# Altium PCB HU_revB.PcbDoc (part 1 of 3)
Units mm, origin at the board's own origin, x right, y up, seen from the top; angles counter-clockwise.
Board outline 180 x 140 mm, 4 copper layers (Top Layer, Mid Layer 1, Mid Layer 2, Bottom Layer), stack 1.586 mm thick; 314 components, 348 nets, 1361 pads, 16 vias.
Unrouted connection lines stored in the file: 902.
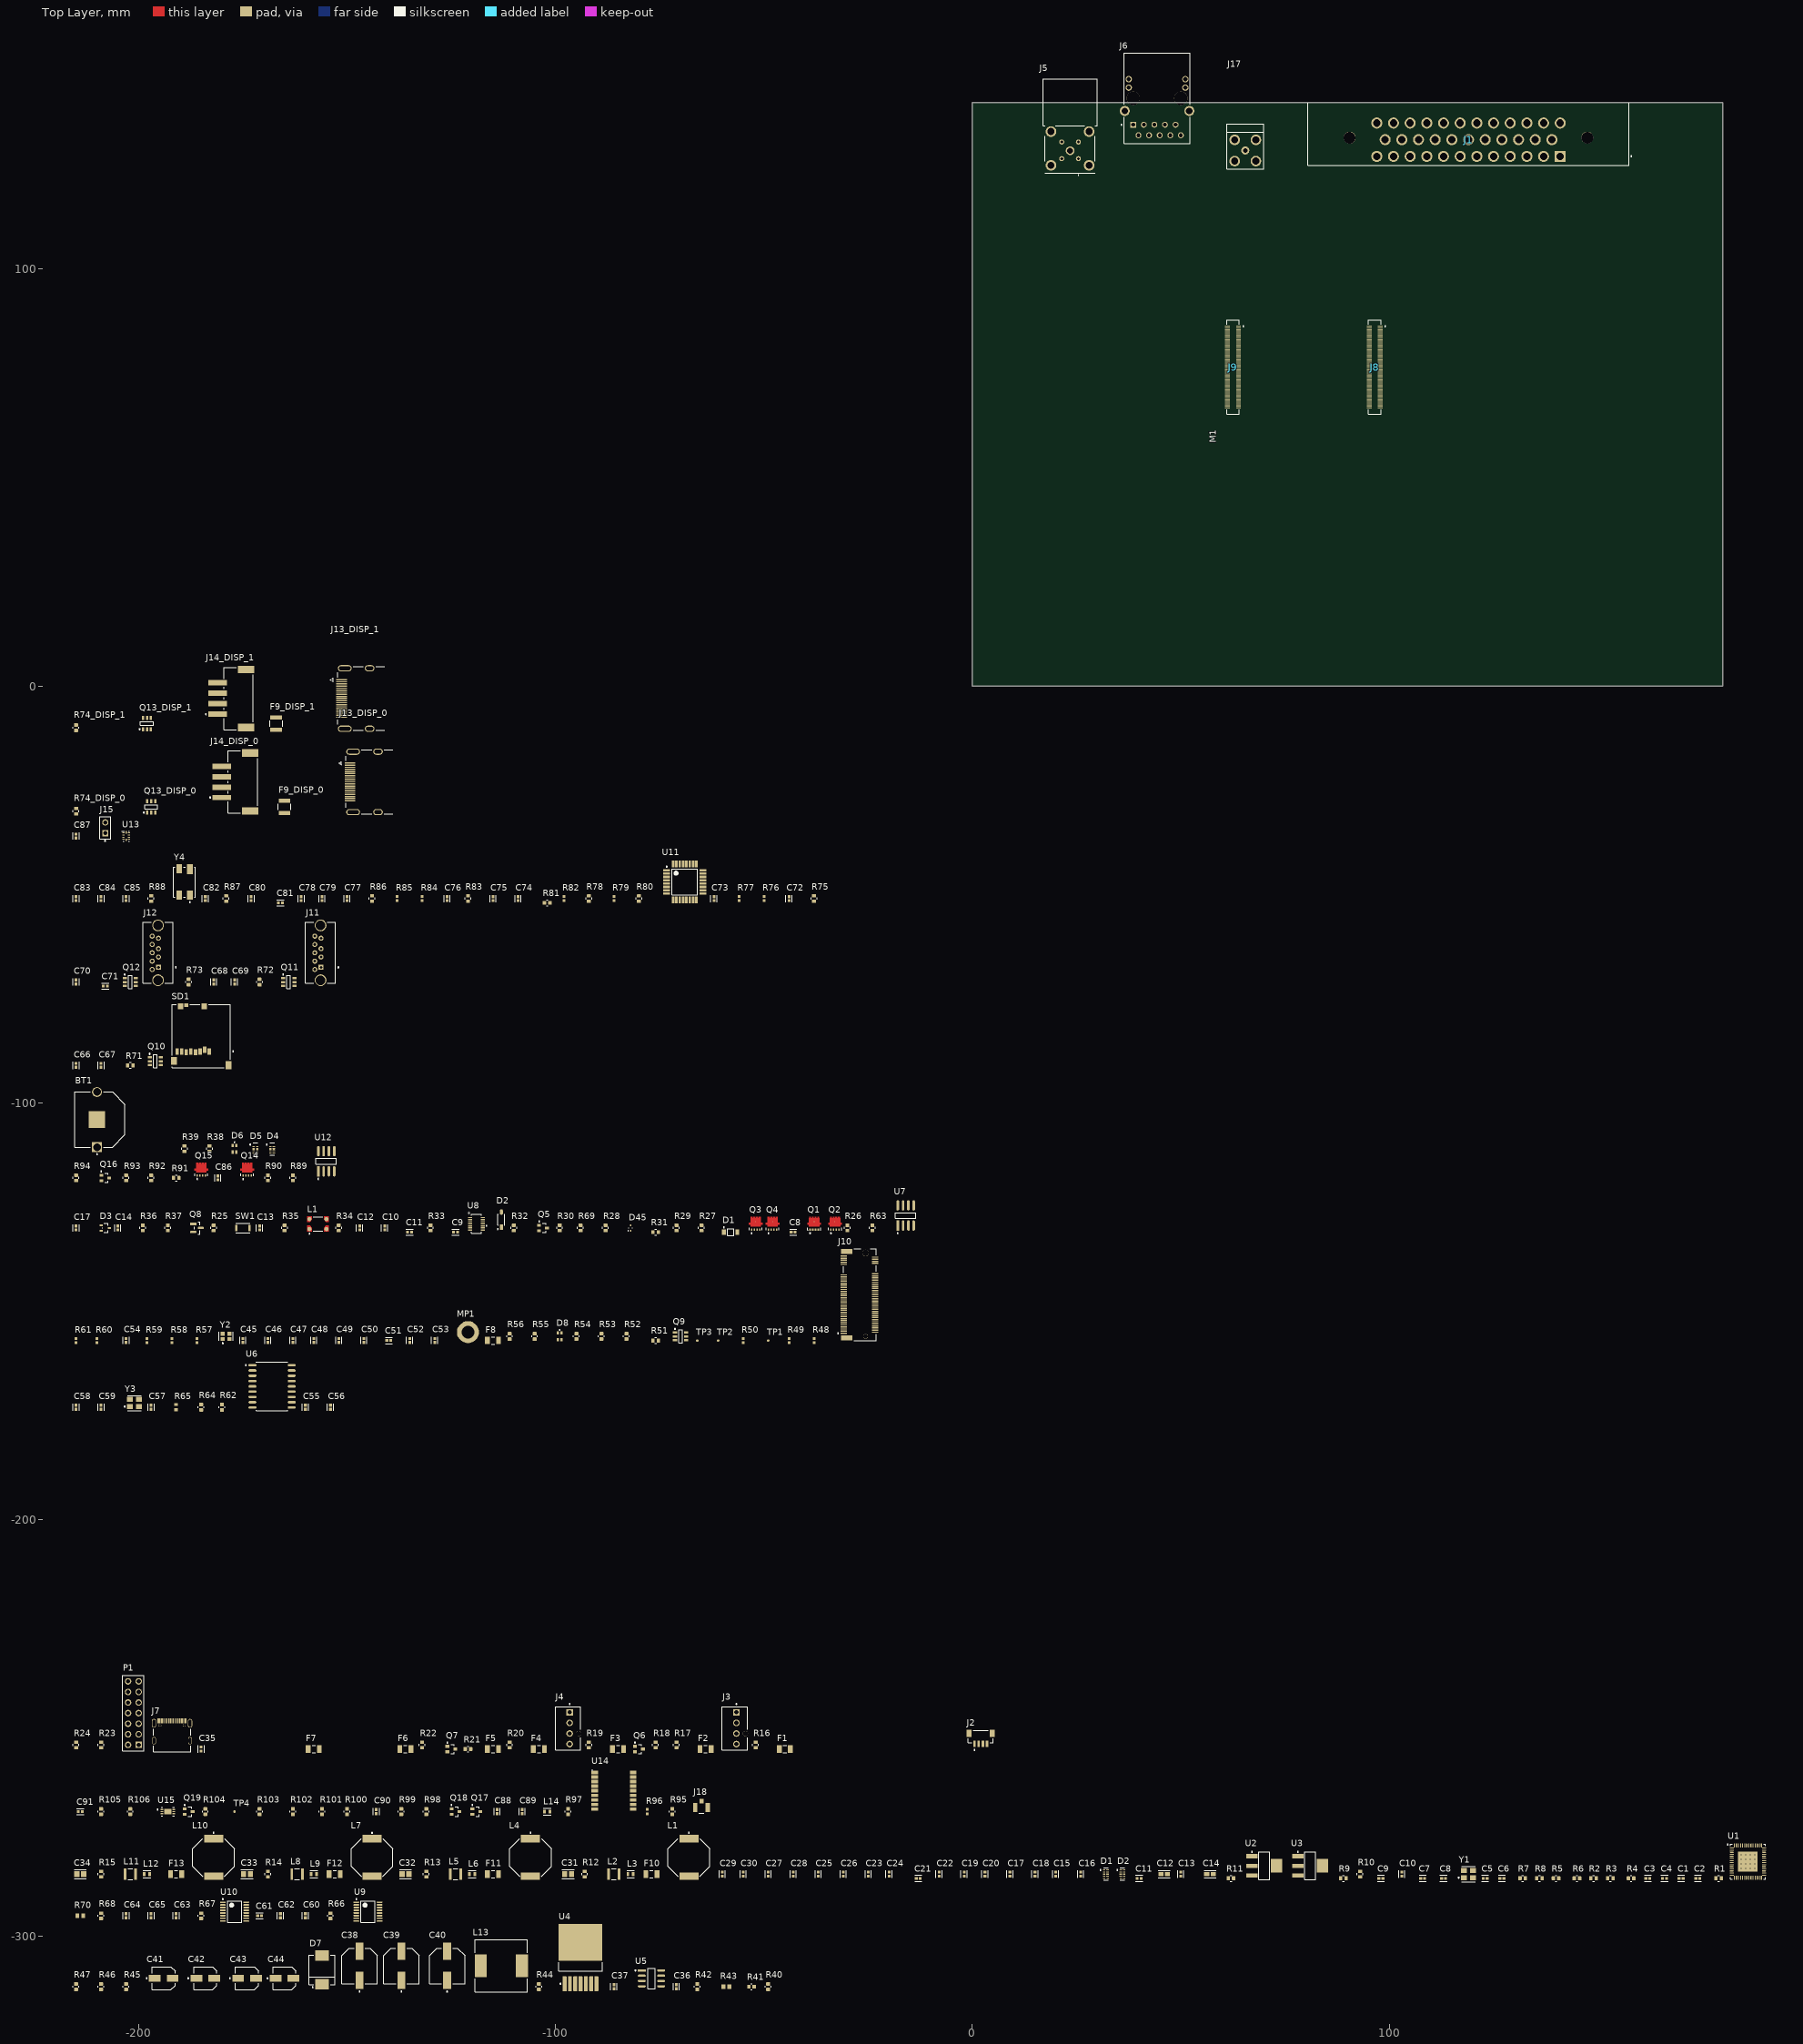
[diagram p0: Top Layer view]
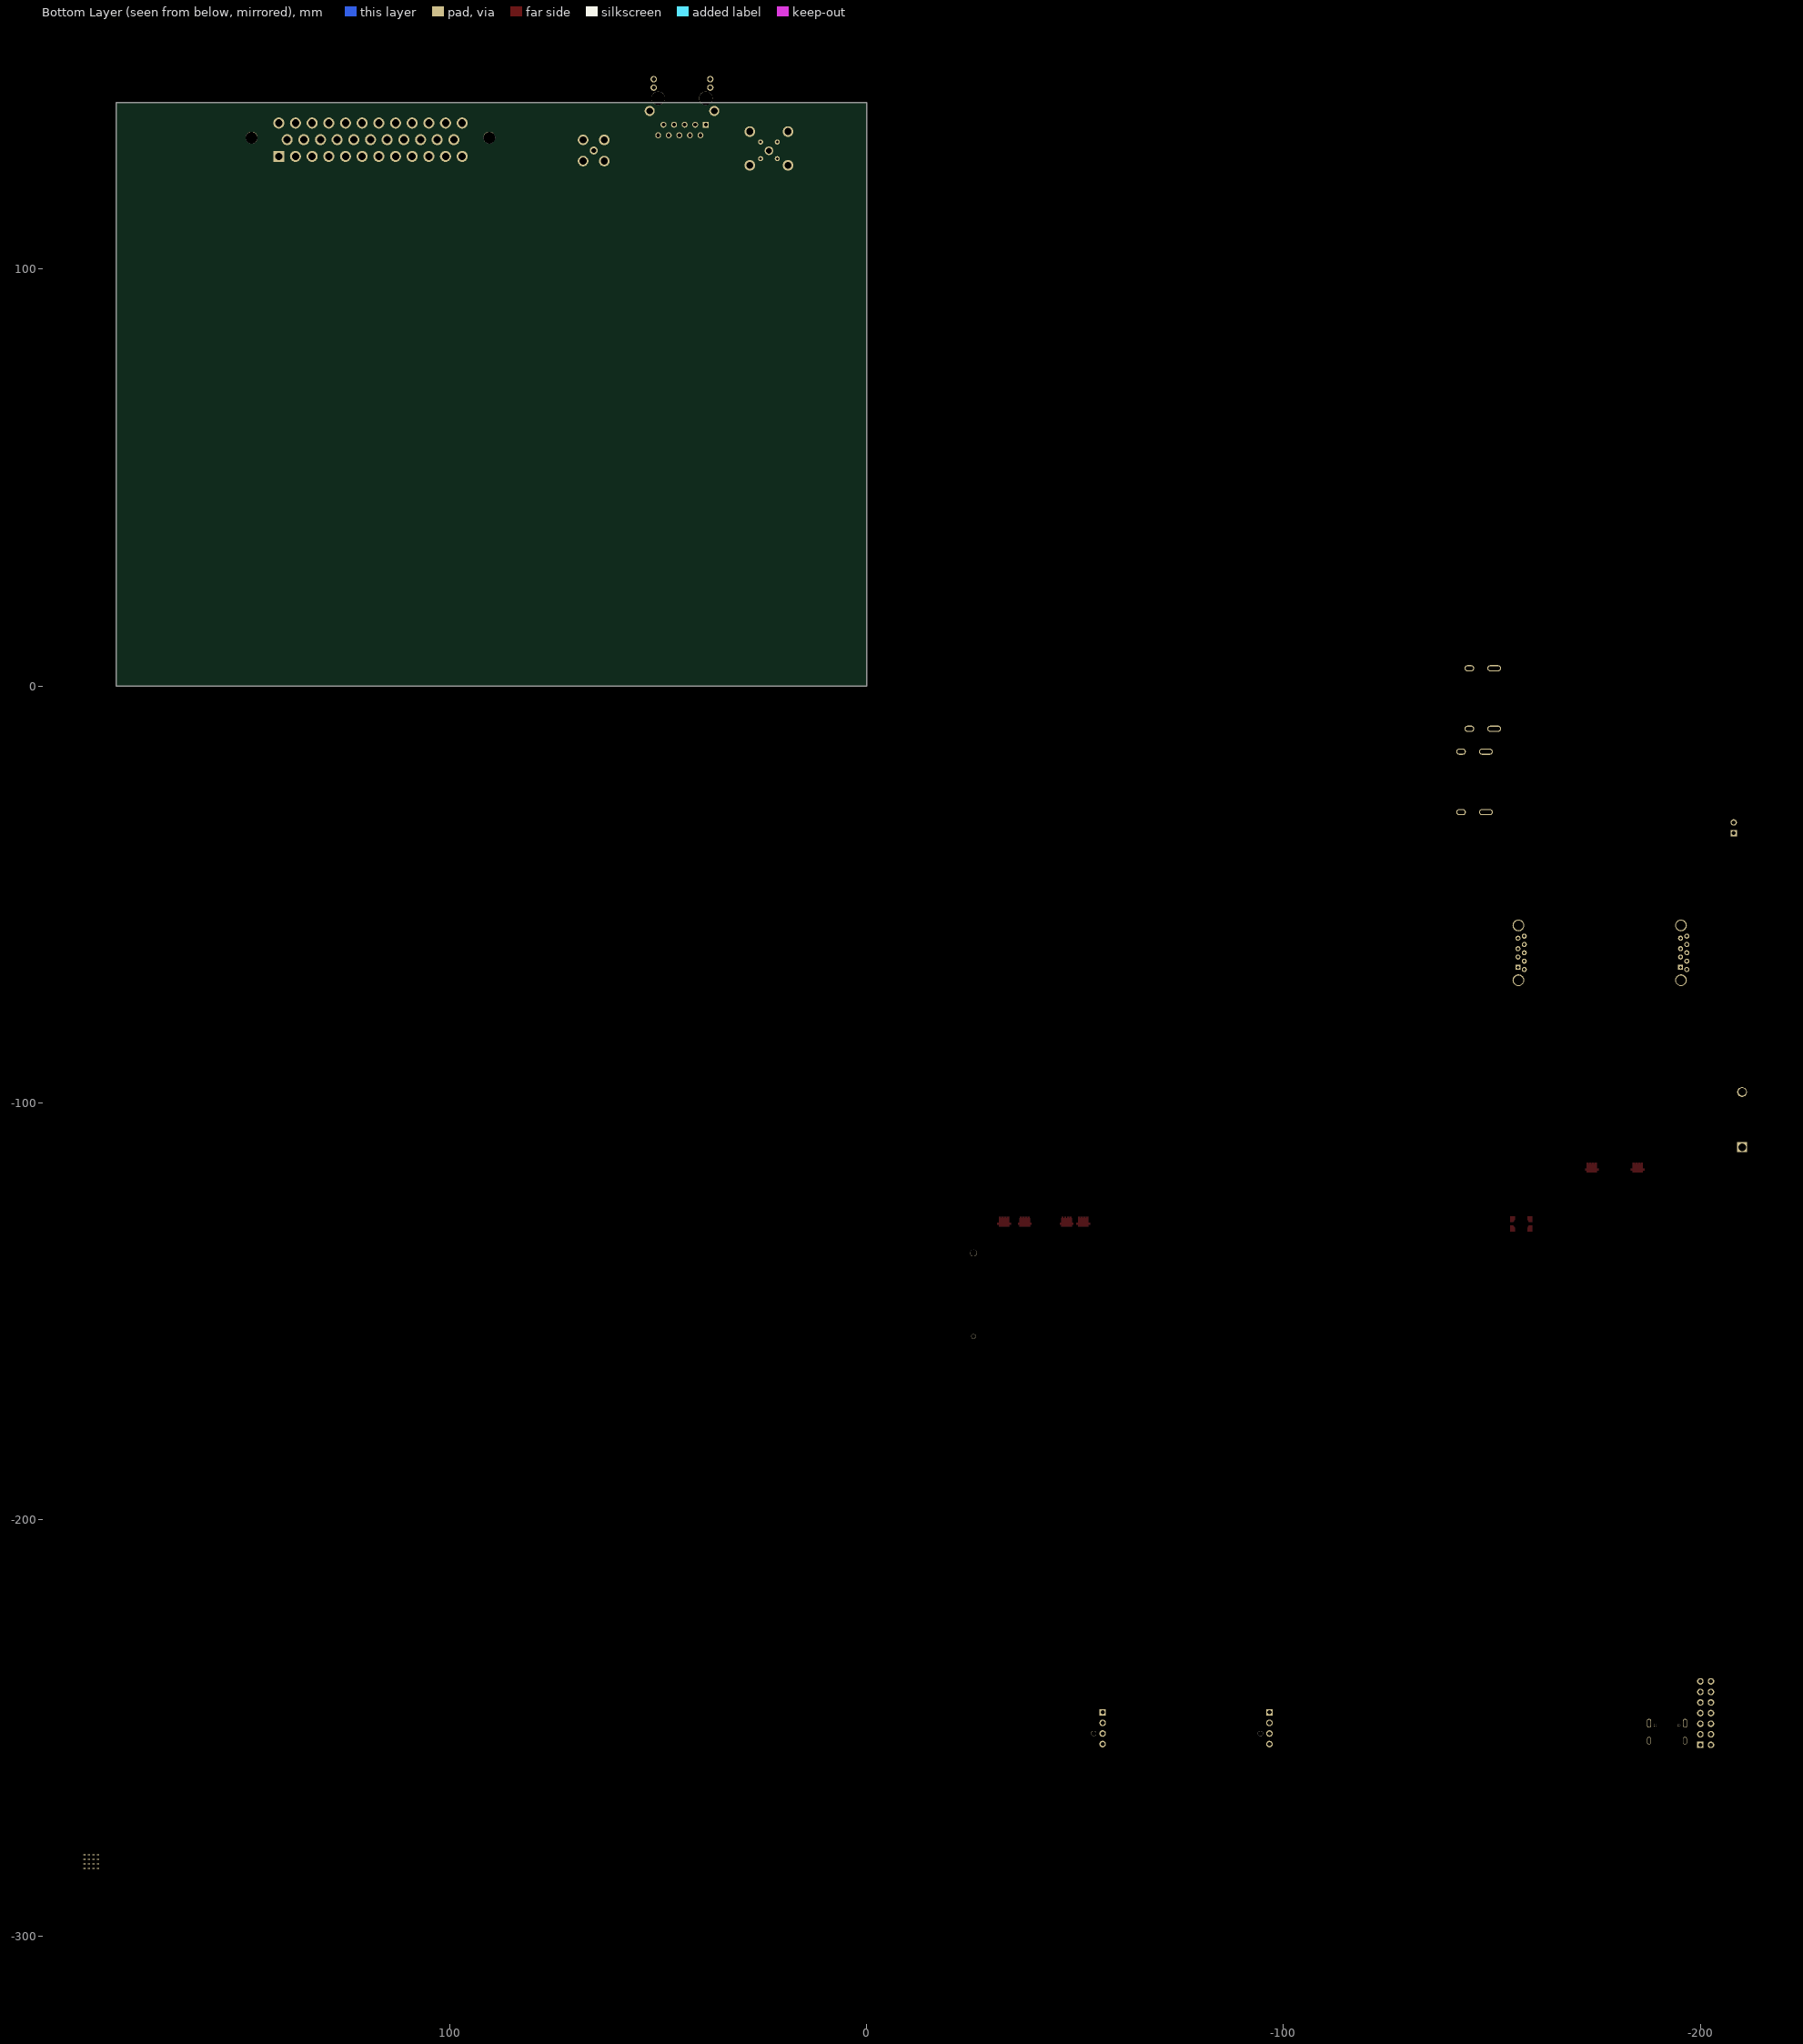
[diagram p1: Bottom Layer view, seen from below]

## Layer stack, top to bottom
Top Solder: solder mask 0.0127, Solder Resist, Dk 3.8
Top Layer: signal copper 0.035
Dielectric 1: prepreg 0.2104, 7628, Dk 4.6
Mid Layer 1: signal copper 0.0152
Core: core 1.065, FR-4, Dk 4.5
Mid Layer 2: signal copper 0.0152
Dielectric 2: prepreg 0.2104, 7628, Dk 4.6
Bottom Layer: signal copper 0.035
Bottom Solder: solder mask 0.0127, Solder Resist, Dk 3.8

## Board outline
0,0 0,140 180,140 180,0

## Design rules (kind name [scope] priority, off if disabled: settings)
BoardOutlineClearance [All] p1: gap=0.2 ignorepadtopadclearanceinfootprint=FALSE
Clearance [All] p1: gap=0.102 ignorepadtopadclearanceinfootprint=FALSE except(0.127: Arc-Via Track-Via SMDPad-Via THPad-Via Via-Via Via-Fill Via-Poly Via-Region Via-Text; 0.25: Arc-Hole Track-Hole SMDPad-Hole THPad-Hole Via-Hole Fill-Hole Poly-Hole Region-Hole Text-Hole)
ComponentClearance [All] p1: gap=0.102 collisioncheckmode=3 verticalgap=0.102 showdistances=TRUE
DiffPairsRouting [All] p1: maxlimit=0.102 minlimit=0.102 mostfreqgap=0.102 toplayer_minwidth=0.102 toplayer_maxwidth=1816.048 toplayer_prefwidth=0.102 midlayer1_minwidth=0.102 midlayer1_maxwidth=1816.048 midlayer1_prefwidth=0.102 midlayer2_minwidth=0.102 midlayer2_maxwidth=1816.048 midlayer2_prefwidth=0.102 bottomlayer_minwidth=0.102 bottomlayer_maxwidth=1816.048 bottomlayer_prefwidth=0.102 maxuncoupledlength=12.7
Height [All] p1: minheight=0 maxheight=1816.048 prefheight=12.7
HoleSize [All] p1: absolutevalues=TRUE maxlimit=6.3 minlimit=0.2 maxpercent=80.000 minpercent=20.000
HoleToHoleClearance [All] p1: gap=0.25 allowstackedmicrovias=FALSE
MinimumAnnularRing [All] p1: minimumring=0.076
MinimumSolderMaskSliver [All] p1: minsoldermaskwidth=0
PlaneClearance [All] p1: clearance=0.102
PlaneConnect PlaneConnectPowerPads [InPadClass('PowerPads')] p1: planeconnectstyle=Direct reliefexpansion=0.508 reliefentries=4 reliefconductorwidth=0.254 reliefairgap=0.254
PlaneConnect [All] p2: pad.planeconnectstyle=Relief pad.reliefexpansion=0.3 pad.reliefentries=4 pad.reliefconductorwidth=0.102 pad.reliefairgap=0.102 via.planeconnectstyle=Direct via.reliefexpansion=0.3 via.reliefentries=4 via.reliefconductorwidth=0.127 via.reliefairgap=0.127
PolygonConnect PolygonConnectPowerPads [All vs (InPadClass('PowerPads'))] p1: connectstyle=Direct reliefconductorwidth=0.254 reliefentries=4 polygonreliefangle="90 Angle" airgapwidth=0.254
PolygonConnect [All] p2: thpad.connectstyle=Relief thpad.reliefconductorwidth=0.102 thpad.reliefentries=4 thpad.polygonreliefangle="90 Angle" thpad.airgapwidth=0.102 smdpad.connectstyle=Relief smdpad.reliefconductorwidth=0.102 smdpad.reliefentries=4 smdpad.polygonreliefangle="90 Angle" smdpad.airgapwidth=0.102 via.connectstyle=Direct via.reliefconductorwidth=0.127 via.reliefentries=4 via.polygonreliefangle="90 Angle" via.airgapwidth=0.127
RoutingVias [All] p1: holewidth=0.2 width=0.45 viastyle="Through Hole" minholewidth=0.2 minwidth=0.45 maxholewidth=6.3 maxwidth=6.55
SilkToSilkClearance [All] p1: silktosilkclearance=0
SilkToSolderMaskClearance [IsPad] p1: minsilkscreentomaskgap=0.102 clearancetoexposedcopper=TRUE
SolderMaskExpansion [All] p1: expansion=0.075 istentingtop=FALSE
Width [All] p1: maxlimit=1816.048 minlimit=0.102 preferedwidth=0.102
20 further rules are at their usual default settings.

## Classes and differential pairs
component class USB_MUX_0: C87 J15 U13
component class GPS_0: C88 C89 C90 C91 J17 J18 L14 Q17 Q18 Q19 R95 R96 R97 R98 R99 R100 R101 R102 R103 R104 R105 R106 TP4 U14 U15
component class USB: C68 C69 C70 C71 J11 J12 Q11 Q12 R72 R73
component class ADC_0: C60 C61 C62 C63 C64 C65 R66 R67 R68 R70 U9 U10
component class NVME_0: C45 C46 C47 C48 C49 C50 C51 C52 C53 C54 D8 F8 J10 MP1 Q9 R48 R49 R50 R51 R52 R53 R54 R55 R56 R57 R58 R59 R60 R61 TP1 TP2 TP3 Y2
component class USB2_HUB_0: C72 C73 C74 C75 C76 C77 C78 C79 C80 C81 C82 C83 C84 C85 R75 R76 R77 R78 R79 R80 R81 R82 R83 R84 R85 R86 R87 R88 U11 Y4
component class MCP2515: C55 C56 C57 C58 C59 R62 R64 R65 U6 Y3
component class SD: C66 C67 Q10 R71 SD1
differential pair class USB2: D0 D1 D2 D3 DIGI_USB_DISP_0 DIGI_USB_DISP_1
differential pair class PCIe: PCIE0_CLK PCIE0_TX0 PCIE_RX0
differential pair class CSI1: CKB DB0 DB1 DB2 DB3
differential pair class CSI1_PRE: CKB DB0 DB1 DB2 DB3
differential pair class CSI0: CKA DA0 DA1 DA2 DA3
differential pair class CSI0_PRE: CKC DA0 DA1 DA2 DA3
differential pair class 100DIFF: SIOA SIOB SIOC SIOD
channel class HDMI: DISP_0 DISP_1
net class PWR: 5V_REG_FB NetC31_1 NetC32_1 NetC33_1 NetC34_1 NetC37_2 NetC38_2 NetF10_2 NetF11_2 NetF12_2 NetF13_2 NetL2_2 NetL5_2 NetL8_2 NetL11_2 PoC_PWR
net class 50SINGLE: NetC3_2 NetC4_2 NetC7_2 NetC8_2 NetJ18_1 PoC_A PoC_B PoC_C PoC_D
component class 5V_0: C36 C37 C38 C39 C40 C41 C42 C43 C44 D7 L13 R40 R41 R42 R43 R44 R45 R46 R47 U4 U5
component class PWR_SW_0: C86 Q14 Q15 Q16 R89 R90 R91 R92 R93 R94 U12
component class RPI_0: BT1 D4 D5 D6 J8 J9 R38 R39
component class PWR_MGMT: C8 C9 C10 C11 C12 C13 C14 C17 D1 D2 D3 D45 L1 Q1 Q2 Q3 Q4 Q5 Q8 R25 R26 R27 R28 R29 R30 R31 R32 R33 R34 R35 R36 R37 R63 R69 SW1 U7 U8
component class HU_revB: C35 F1 F2 F3 F4 F5 F6 F7 J1 J2 J3 J4 J5 J6 J7 P1 Q6 Q7 R16 R17 R18 R19 R20 R21 R22 R23 R24
component class GMSL_DESERIALIZER_0: C1 C2 C3 C4 C5 C6 C7 C8 C9 C10 C11 C12 C13 C14 C15 C16 C17 C18 C19 C20 C21 C22 C23 C24 C25 C26 C27 C28 C29 C30 C31 C32 C33 C34 D1 D2 F10 F11 F12 F13 L1 L2 L3 L4 L5 L6 L7 L8 L9 L10 L11 L12 R1 R2 R3 R4 R5 R6 R7 R8 R9 R10 R11 R12 R13 R14 R15 U1 U2 U3 Y1
component class DISP_1: F9_DISP_1 J13_DISP_1 J14_DISP_1 Q13_DISP_1 R74_DISP_1
component class DISP_0: F9_DISP_0 J13_DISP_0 J14_DISP_0 Q13_DISP_0 R74_DISP_0
differential pair class CAN: CAN PRE_CAN
differential pair X: +X_P -X_N
differential pair X25: +X25_P -X25_N
differential pair TUSB2036_X: +TUSB2036_X_P -TUSB2036_X_N
differential pair SIOD: +SIOD_P -SIOD_N
differential pair SIOC: +SIOC_P -SIOC_N
differential pair SIOB: +SIOB_P -SIOB_N
differential pair SIOA: +SIOA_P -SIOA_N
differential pair PCIE_RX0: +PCIE_RX0_P -PCIE_RX0_N
differential pair PCIE0_TX0: +PCIE0_TX0_P -PCIE0_TX0_N
differential pair PCIE0_CLK: +PCIE0_CLK_P -PCIE0_CLK_N
differential pair DIGI_USB_DISP_1: +DIGI_USB_DISP_1_P -DIGI_USB_DISP_1_N
differential pair DIGI_USB_DISP_0: +DIGI_USB_DISP_0_P -DIGI_USB_DISP_0_N
differential pair DB3: +DB3_P -DB3_N
differential pair DB2: +DB2_P -DB2_N
differential pair DB1: +DB1_P -DB1_N
differential pair DB0: +DB0_P -DB0_N
differential pair DA3: +DA3_P -DA3_N
differential pair DA2: +DA2_P -DA2_N
differential pair DA1: +DA1_P -DA1_N
differential pair DA0: +DA0_P -DA0_N
differential pair D3: +D3_P -D3_N
differential pair D2: +D2_P -D2_N
differential pair D1: +D1_P -D1_N
differential pair D0: +D0_P -D0_N
differential pair CKC: +CKC_P -CKC_N
differential pair CKB: +CKB_P -CKB_N
differential pair CKA: +CKA_P -CKA_N
differential pair PRE_CAN: +PRE_CAN_P -PRE_CAN_N
differential pair CAN: +CAN_P -CAN_N

## Components (designator, comment, footprint, x,y, rotation, side; value= is the part's Value field where it differs from the comment)
BT1 "3001" KSTN-3001_V -210,-104 r90 top
C1 "100n" FP-0402-L_1_0_0_05-W_0_5-IPC_A 170,-286 r0 top
C2 "100n" FP-0402-L_1_0_0_05-W_0_5-IPC_A 174,-286 r0 top
C3 "100n" FP-0402-L_1_0_0_05-W_0_5-IPC_A 162,-286 r0 top
C4 "100n" FP-0402-L_1_0_0_05-W_0_5-IPC_A 166,-286 r0 top
C5 "100n" FP-0402-L_1_0_0_05-W_0_5-IPC_A 123,-286 r0 top
C6 "100n" FP-0402-L_1_0_0_05-W_0_5-IPC_A 127,-286 r0 top
C7 "100n" FP-0402-L_1_0_0_05-W_0_5-IPC_A 108,-286 r0 top
C8 "100n" FP-0402-L_1_0_0_05-W_0_5-IPC_A 113,-286 r0 top
C8 "100n" FP-0402-L_1_0_0_05-W_0_5-IPC_A -43,-131 r0 top
C9 "30p" FP-0402-L_1_0_0_05-W_0_5-IPC_A 98,-286 r0 top
C9 "100n" FP-0402-L_1_0_0_05-W_0_5-IPC_A -124,-131 r0 top
C10 "30p" FP-0402-L_1_0_0_05-W_0_5-IPC_A 103,-285 r90 top
C10 "100n" FP-0402-L_1_0_0_05-W_0_5-IPC_A -141,-130 r90 top
C11 "100n" FP-0402-L_1_0_0_05-W_0_5-IPC_A 40,-286 r0 top
C11 "100n" FP-0402-L_1_0_0_05-W_0_5-IPC_A -135,-131 r0 top
C12 "GRM188R60J106ME47D" FP-GRM188-0_1-e0_2_0_55-IPC_A 46,-285 r0 top
C12 "6.6p" FP-0402-L_1_0_0_05-W_0_5-IPC_A -147,-130 r90 top
C13 "100n" FP-0402-L_1_0_0_05-W_0_5-IPC_A 50,-285 r90 top
C13 "100n" FP-0402-L_1_0_0_05-W_0_5-IPC_A -171,-130 r90 top
C14 "GRM188R60J106ME47D" FP-GRM188-0_1-e0_2_0_55-IPC_A 57,-285 r0 top
C14 "6.6p" FP-0402-L_1_0_0_05-W_0_5-IPC_A -205,-130 r90 top
C15 "10u" FP-0402-L_1_0_0_05-W_0_5-IPC_A 20,-285 r90 top
C16 "100n" FP-0402-L_1_0_0_05-W_0_5-IPC_A 26,-285 r90 top
C17 "10u" FP-0402-L_1_0_0_05-W_0_5-IPC_A 9,-285 r90 top
C17 "100n" FP-0402-L_1_0_0_05-W_0_5-IPC_A -215,-130 r90 top
C18 "100n" FP-0402-L_1_0_0_05-W_0_5-IPC_A 15,-285 r90 top
C19 "10u" FP-0402-L_1_0_0_05-W_0_5-IPC_A -2,-285 r90 top
C20 "100n" FP-0402-L_1_0_0_05-W_0_5-IPC_A 3,-285 r90 top
C21 "10u" FP-0402-L_1_0_0_05-W_0_5-IPC_A -13,-286 r0 top
C22 "100n" FP-0402-L_1_0_0_05-W_0_5-IPC_A -8,-285 r90 top
C23 "10u" FP-0402-L_1_0_0_05-W_0_5-IPC_A -25,-285 r90 top
C24 "10n" FP-0402-L_1_0_0_05-W_0_5-IPC_A -20,-285 r90 top
C25 "10u" FP-0402-L_1_0_0_05-W_0_5-IPC_A -37,-285 r90 top
C26 "10n" FP-0402-L_1_0_0_05-W_0_5-IPC_A -31,-285 r90 top
C27 "10u" FP-0402-L_1_0_0_05-W_0_5-IPC_A -49,-285 r90 top
C28 "10n" FP-0402-L_1_0_0_05-W_0_5-IPC_A -43,-285 r90 top
C29 "10u" FP-0402-L_1_0_0_05-W_0_5-IPC_A -60,-285 r90 top
C30 "10n" FP-0402-L_1_0_0_05-W_0_5-IPC_A -55,-285 r90 top
C31 "GRM21BR61E226ME44L" FP-GRM21B-0_2-e0_2_0_7-IPC_B -97,-285 r0 top
C32 "GRM21BR61E226ME44L" FP-GRM21B-0_2-e0_2_0_7-IPC_B -136,-285 r0 top
C33 "GRM21BR61E226ME44L" FP-GRM21B-0_2-e0_2_0_7-IPC_B -174,-285 r0 top
C34 "GRM21BR61E226ME44L" FP-GRM21B-0_2-e0_2_0_7-IPC_B -214,-285 r0 top
C35 "100n" FP-0402-L_1_0_0_05-W_0_5-IPC_A -185,-255 r90 top
C36 "100n" FP-0402-L_1_0_0_05-W_0_5-IPC_A -71,-312 r90 top
C37 "10n" FP-0402-L_1_0_0_05-W_0_5-IPC_A -86,-312 r90 top
C38 "20SVP33M" FP-OS-CON-SMT-E7-MFG -147,-307 r90 top
C39 "20SVP33M" FP-OS-CON-SMT-E7-MFG -137,-307 r90 top
C40 "20SVP33M" FP-OS-CON-SMT-E7-MFG -126,-307 r90 top
C41 "EEE-1AA101WR" FP-SC-MFG -194,-310 r0 top
C42 "EEE-1AA101WR" FP-SC-MFG -184,-310 r0 top
C43 "EEE-1AA101WR" FP-SC-MFG -174,-310 r0 top
C44 "EEE-1AA101WR" FP-SC-MFG -165,-310 r0 top
C45 "10u" FP-0402-L_1_0_0_05-W_0_5-IPC_A -175,-157 r90 top
C46 "10u" FP-0402-L_1_0_0_05-W_0_5-IPC_A -169,-157 r90 top
C47 "10u" FP-0402-L_1_0_0_05-W_0_5-IPC_A -163,-157 r90 top
C48 "100n" FP-0402-L_1_0_0_05-W_0_5-IPC_A -158,-157 r90 top
C49 "100n" FP-0402-L_1_0_0_05-W_0_5-IPC_A -152,-157 r90 top
C50 "100n" FP-0402-L_1_0_0_05-W_0_5-IPC_A -146,-157 r90 top
C51 "100n" FP-0402-L_1_0_0_05-W_0_5-IPC_A -140,-157 r0 top
C52 "100n" FP-0402-L_1_0_0_05-W_0_5-IPC_A -135,-157 r90 top
C53 "100n" FP-0402-L_1_0_0_05-W_0_5-IPC_A -129,-157 r90 top
C54 "100n" FP-0402-L_1_0_0_05-W_0_5-IPC_A -203,-157 r90 top
C55 "10u" FP-0402-L_1_0_0_05-W_0_5-IPC_A -160,-173 r90 top
C56 "100n" FP-0402-L_1_0_0_05-W_0_5-IPC_A -154,-173 r90 top
C57 "100n" FP-0402-L_1_0_0_05-W_0_5-IPC_A -197,-173 r90 top
C58 "100n" FP-0402-L_1_0_0_05-W_0_5-IPC_A -215,-173 r90 top
C59 "100n" FP-0402-L_1_0_0_05-W_0_5-IPC_A -209,-173 r90 top
C60 "100n" FP-0402-L_1_0_0_05-W_0_5-IPC_A -160,-295 r90 top
C61 "100n" FP-0402-L_1_0_0_05-W_0_5-IPC_A -171,-295 r0 top
C62 "100n" FP-0402-L_1_0_0_05-W_0_5-IPC_A -166,-295 r90 top
C63 "100n" FP-0402-L_1_0_0_05-W_0_5-IPC_A -191,-295 r90 top
C64 "100n" FP-0402-L_1_0_0_05-W_0_5-IPC_A -203,-295 r90 top
C65 "100n" FP-0402-L_1_0_0_05-W_0_5-IPC_A -197,-295 r90 top
C66 "10u" FP-0402-L_1_0_0_05-W_0_5-IPC_A -215,-91 r90 top
C67 "100n" FP-0402-L_1_0_0_05-W_0_5-IPC_A -209,-91 r90 top
C68 "10u" FP-0402-L_1_0_0_05-W_0_5-IPC_A -182,-71 r90 top
C69 "100n" FP-0402-L_1_0_0_05-W_0_5-IPC_A -177,-71 r90 top
C70 "10u" FP-0402-L_1_0_0_05-W_0_5-IPC_A -215,-71 r90 top
C71 "100n" FP-0402-L_1_0_0_05-W_0_5-IPC_A -208,-72 r0 top
C72 "22p" FP-0402-L_1_0_0_05-W_0_5-IPC_A -44,-51 r90 top
C73 "22p" FP-0402-L_1_0_0_05-W_0_5-IPC_A -62,-51 r90 top
C74 "22p" FP-0402-L_1_0_0_05-W_0_5-IPC_A -109,-51 r90 top
C75 "22p" FP-0402-L_1_0_0_05-W_0_5-IPC_A -115,-51 r90 top
C76 "22p" FP-0402-L_1_0_0_05-W_0_5-IPC_A -126,-51 r90 top
C77 "22p" FP-0402-L_1_0_0_05-W_0_5-IPC_A -150,-51 r90 top
C78 "10u" FP-0402-L_1_0_0_05-W_0_5-IPC_A -161,-51 r90 top
C79 "100n" FP-0402-L_1_0_0_05-W_0_5-IPC_A -156,-51 r90 top
C80 "10u" FP-0402-L_1_0_0_05-W_0_5-IPC_A -173,-51 r90 top
C81 "100n" FP-0402-L_1_0_0_05-W_0_5-IPC_A -166,-52 r0 top
C82 "22p" FP-0402-L_1_0_0_05-W_0_5-IPC_A -184,-51 r90 top
C83 "30p" FP-0402-L_1_0_0_05-W_0_5-IPC_A -215,-51 r90 top
C84 "30p" FP-0402-L_1_0_0_05-W_0_5-IPC_A -209,-51 r90 top
C85 "22p" FP-0402-L_1_0_0_05-W_0_5-IPC_A -203,-51 r90 top
C86 "100n" FP-0402-L_1_0_0_05-W_0_5-IPC_A -181,-118 r90 top
C87 "100n" FP-0402-L_1_0_0_05-W_0_5-IPC_A -215,-36 r90 top
C88 "100n" FP-0402-L_1_0_0_05-W_0_5-IPC_A -114,-270 r90 top
C89 "10u" FP-0402-L_1_0_0_05-W_0_5-IPC_A -108,-270 r90 top
C90 "10n" FP-0402-L_1_0_0_05-W_0_5-IPC_A -143,-270 r90 top
C91 "100n" FP-0402-L_1_0_0_05-W_0_5-IPC_A -214,-270 r0 top
D1 "ESD204DQAR" FP-DQA0010A-MFG 32,-285 r0 top value=0.55pF
D1 "MMSZ5242BT1G" ONSC-SOD-123-2-425-04_V -58,-131 r0 top
D2 "ESD204DQAR" FP-DQA0010A-MFG 36,-285 r0 top value=0.55pF
D2 "1N4148W-TP" FP-SOD-123-IPC_A -113,-128 r90 top
D3 "ESDCAN02-2BWY" FP-SOT323-3L-MFG -208,-130 r0 top value=3pF
D4 "ESD204DQAR" FP-DQA0010A-MFG -168,-111 r0 top value=0.55pF
D5 "ESD204DQAR" FP-DQA0010A-MFG -172,-111 r0 top value=0.55pF
D6 "150066RG54050" WL-SBCD_0606 -177,-111 r0 top
D7 "B540C-13-F" FP-SMC-MFG -156,-308 r90 top value=300pF
D8 "150066RG54050" WL-SBCD_0606 -99,-156 r0 top
D45 "DNP/MM5Z3V3T1G" ONSC-SOD-523-2-502-01_V -82,-130 r90 top
F1 ".5" FP-0685T-MFG -45,-255 r0 top
F2 ".5" FP-0685T-MFG -64,-255 r0 top
F3 "2.5" FP-0685T-MFG -85,-255 r0 top
F4 ".5" FP-0685T-MFG -104,-255 r0 top
F5 "1.5" FP-0685T-MFG -115,-255 r0 top
F6 "2.5" FP-0685T-MFG -136,-255 r0 top
F7 "20" FP-0685T-MFG -158,-255 r0 top
F8 "1" FP-0685T-MFG -115,-157 r0 top
F9_DISP_0 "0ZCH0075AF2E" 0ZCH0075AF2E-Footprint-1 -165,-29 r90 top (schematic designator F9)
F9_DISP_1 "0ZCH0075AF2E" 0ZCH0075AF2E-Footprint-1 -167,-9 r90 top (schematic designator F9)
F10 ".25" FP-0685T-MFG -77,-285 r0 top
F11 ".25" FP-0685T-MFG -115,-285 r0 top
F12 ".25" FP-0685T-MFG -153,-285 r0 top
F13 ".25" FP-0685T-MFG -191,-285 r0 top
J1 "776163-1" FP-776163-1-MFG 119,144 r180 top
J2 "BM04B-SRSS-TBT(LF)(SN)" FP-BM04B-SRSS-TBT_LF_SN-MFG 2,-252 r0 top
J3 "47053-1000" FP-470531000-MFG -57,-250 r90 top
J4 "47053-1000" FP-470531000-MFG -97,-250 r90 top
J5 "FM4-NZRP-PCB-1" FM4-NZRP-PCB-1-Footprint-1 23.425,128.4 r90 top
J6 "RJMG201K21120FR" RJMG201K21120FR-Footprint-1 44.285,141 r180 top
J7 "12402012E212A" 12402012E212A-Footprint-1 -192,-253 r0 top
J8 "10164227-1001A1RLF" 10164227-1001A1RLF-Footprint-1 96.5,76.5 r90 top
J9 "10164227-1001A1RLF" 10164227-1001A1RLF-Footprint-1 62.5,76.5 r90 top
J10 "1-2199230-6" FP-1-2199230-6-MFG -27,-146 r90 top
J11 "48408-0003" MOLX-48408-0003_V -157,-64 r90 top
J12 "48408-0003" MOLX-48408-0003_V -196,-64 r90 top
J13_DISP_0 "208658-1052" 208658-1052-Footprint-1 -139,-23 r90 top (schematic designator J13)
J13_DISP_1 "208658-1052" 208658-1052-Footprint-1 -141,-3 r90 top (schematic designator J13)
J14_DISP_0 "S4B-XH-SM4-TB(LF)(SN)" FP-S4B-XH-SM4-TB_LF_SN-MFG -175,-23 r90 top (schematic designator J14)
J14_DISP_1 "S4B-XH-SM4-TB(LF)(SN)" FP-S4B-XH-SM4-TB_LF_SN-MFG -176,-3 r90 top (schematic designator J14)
J15 "MTLW-102-07-G-S-230" FP-MTLW-102-07-G-S-230-MFG -208,-34 r90 top
J17 "FA1-NDRP-PCB-8" FA1-NDRP-PCB-8-Footprint-1 65.46,128.46 r0 top
J18 "U.FL-R-SMT(10)" FP-U_FL-R-SMT_10-MFG -65,-269 r0 top
L1 "744066101" WE-TPC_1038 -68,-281 r0 top
L1 "SRF4532-510Y" FP-SRF4532-MFG -157,-129 r0 top
L2 "ADL32VHC-220M" FP-1210POC-MFG -86,-285 r0 top value=22uH
L3 "PFL1609-561MEW" FP-PFL1609-MFG -82,-285 r0 top value=0.56uH
L4 "744066101" WE-TPC_1038 -106,-281 r0 top
L5 "ADL32VHC-220M" FP-1210POC-MFG -124,-285 r0 top value=22uH
L6 "PFL1609-561MEW" FP-PFL1609-MFG -120,-285 r0 top value=0.56uH
L7 "744066101" WE-TPC_1038 -144,-281 r0 top
L8 "ADL32VHC-220M" FP-1210POC-MFG -162,-285 r0 top value=22uH
L9 "PFL1609-561MEW" FP-PFL1609-MFG -158,-285 r0 top value=0.56uH
L10 "744066101" WE-TPC_1038 -182,-281 r0 top
L11 "ADL32VHC-220M" FP-1210POC-MFG -202,-285 r0 top value=22uH
L12 "PFL1609-561MEW" FP-PFL1609-MFG -198,-285 r0 top value=0.56uH
L13 "74477110" WE-PD-L -113,-307 r0 top
L14 "LQW18AN27NJ00D" FP-LQW18AN_00-MFG -102,-270 r0 top
M1 "Comment" "RPI CM5 W_ COOLER-Footprint-1" 96,55 r90 top
MP1 "9774025243R" 9774025243 -121,-155 r0 top
P1 "MTSW-107-07-G-D-170" SMTC-MTSW-107-07-X-D-170 -200,-254 r90 top
Q1 "SISH615ADN-T1-GE3" SISH615ADN-T1-GE3-Footprint-1 -38,-129 r0 top
Q2 "SISH615ADN-T1-GE3" SISH615ADN-T1-GE3-Footprint-1 -33,-129 r0 top
Q3 "SISH615ADN-T1-GE3" SISH615ADN-T1-GE3-Footprint-1 -52,-129 r0 top
Q4 "SISH615ADN-T1-GE3" SISH615ADN-T1-GE3-Footprint-1 -48,-129 r0 top
Q5 "BSS138W-7-F" DIOD-SOT323-3_V -103,-130 r0 top
Q6 "BSS138W-7-F" DIOD-SOT323-3_V -80,-255 r0 top
Q7 "BSS138W-7-F" DIOD-SOT323-3_V -125,-255 r0 top
Q8 "BSS138" FP-318-08-IPC_B -186,-130 r0 top
Q9 "SIP32510DT-T1-GE3" SOT95P284X110-6N -70,-156 r0 top
Q10 "SIP32510DT-T1-GE3" SOT95P284X110-6N -196,-90 r0 top
Q11 "SIP32510DT-T1-GE3" SOT95P284X110-6N -164,-71 r0 top
Q12 "SIP32510DT-T1-GE3" SOT95P284X110-6N -202,-71 r0 top
Q13_DISP_0 "SIP32510DT-T1-GE3" SOT95P284X110-6N -197,-29 r90 top (schematic designator Q13)
Q13_DISP_1 "SIP32510DT-T1-GE3" SOT95P284X110-6N -198,-9 r90 top (schematic designator Q13)
Q14 "SISH615ADN-T1-GE3" SISH615ADN-T1-GE3-Footprint-1 -174,-116 r0 top
Q15 "SISH615ADN-T1-GE3" SISH615ADN-T1-GE3-Footprint-1 -185,-116 r0 top
Q16 "BSS138W-7-F" DIOD-SOT323-3_V -208,-118 r0 top
Q17 "DMG1013UW-7" DIOD-SOT323-3_V -119,-270 r0 top
Q18 "BSS138W-7-F" DIOD-SOT323-3_V -124,-270 r0 top
Q19 "DMG1013UW-7" DIOD-SOT323-3_V -188,-270 r0 top
R1 "402" R0603B 179,-286 r0 top
R2 "10k" R0603B 149,-286 r0 top
R3 "49.9" R0603B 153,-286 r0 top
R4 "49.9" R0603B 158,-286 r0 top
R5 "DNP" R0603B 140,-286 r0 top
R6 "DNP" R0603B 145,-286 r0 top
R7 "10k" R0603B 132,-286 r0 top
R8 "10k" R0603B 136,-286 r0 top
R9 "49.9" R0603B 89,-286 r0 top
R10 "49.9" R0603B 93,-285 r90 top
R11 "120" R0603B 62,-286 r0 top
R12 "5.1k" R0603B -93,-285 r90 top
R13 "5.1k" R0603B -131,-285 r90 top
R14 "5.1k" R0603B -169,-285 r90 top
R15 "5.1k" R0603B -209,-285 r90 top
R16 "100k" R0603B -52,-254 r90 top
R17 "100k" R0603B -71,-254 r90 top
R18 "1k" R0603B -76,-254 r90 top
R19 "100k" R0603B -92,-254 r90 top
R20 "100k" R0603B -111,-254 r90 top
R21 "1k" R0603B -121,-255 r0 top
R22 "100k" R0603B -132,-254 r90 top
R23 "1k" R0603B -209,-254 r90 top
R24 "1k" R0603B -215,-254 r90 top
R25 "1k" R0603B -182,-130 r90 top
R26 "100k" R0603B -30,-130 r90 top
R27 "100k" R0603B -65,-130 r90 top
R28 "100k" R0603B -88,-130 r90 top
R29 "100k" R0603B -71,-130 r90 top
R30 "1k" R0603B -99,-130 r90 top
R31 "24k" R0603B -76,-131 r0 top
R32 "100k" R0603B -110,-130 r90 top
R33 "100k" R0603B -130,-130 r90 top
R34 "1k" R0603B -152,-130 r90 top
R35 "60.4" R0603B -165,-130 r90 top
R36 "100k" R0603B -199,-130 r90 top
R37 "60.4" R0603B -193,-130 r90 top
R38 "1k" R0603B -183,-111 r90 top
R39 "1k" R0603B -189,-111 r90 top
R40 "1k" R0603B -49,-312 r90 top
R41 "1k" R0603B -53,-312 r0 top
R42 "100k" R0603B -66,-312 r90 top
R43 "ERT-J1VR103J" RESC1608X90X30ML15T20 -59,-312 r0 top
R44 "1k" R0603B -104,-312 r90 top
R45 "100k" R0603B -203,-312 r90 top
R46 "10k" R0603B -209,-312 r90 top
R47 "100k" R0603B -215,-312 r90 top
R48 "0402 JUMPER" RESC1005X40X25ML05T05 -38,-157 r90 top
R49 "0402 JUMPER" RESC1005X40X25ML05T05 -44,-157 r90 top
R50 "0402 JUMPER" RESC1005X40X25ML05T05 -55,-157 r90 top
R51 "100k" R0603B -76,-157 r0 top
R52 "330" R0603B -83,-156 r90 top
R53 "100k" R0603B -89,-156 r90 top
R54 "100k" R0603B -95,-156 r90 top
R55 "1k" R0603B -105,-156 r90 top
R56 "1k" R0603B -111,-156 r90 top
R57 "0402 JUMPER" RESC1005X40X25ML05T05 -186,-157 r90 top
R58 "0402 JUMPER" RESC1005X40X25ML05T05 -192,-157 r90 top
R59 "0402 JUMPER" RESC1005X40X25ML05T05 -198,-157 r90 top
R60 "0402 JUMPER" RESC1005X40X25ML05T05 -210,-157 r90 top
R61 "0402 JUMPER" RESC1005X40X25ML05T05 -215,-157 r90 top
R62 "100k" R0603B -180,-173 r90 top
R63 "1k" R0603B -24,-130 r90 top
R64 "1k" R0603B -185,-173 r90 top
R65 "ERJ3EKF1002V" RESC1609X55X30LL15T15 -191,-173 r90 top
R66 "56" R0603B -154,-295 r90 top
R67 "56" R0603B -185,-295 r90 top
R68 "1k" R0603B -209,-295 r90 top
R69 "1k" R0603B -94,-130 r90 top
R70 "ERT-J1VR103J" RESC1608X90X30ML15T20 -214,-295 r0 top
R71 "100k" R0603B -202,-91 r0 top
R72 "DNP" R0603B -171,-71 r90 top
R73 "1k" R0603B -188,-71 r90 top
R74_DISP_0 "100k" R0603B -215,-30 r90 top (schematic designator R74)
R74_DISP_1 "100k" R0603B -215,-10 r90 top (schematic designator R74)
R75 "33" R0603B -38,-51 r90 top value=100k
R76 "0402 JUMPER" RESC1005X40X25ML05T05 -50,-51 r90 top
R77 "0402 JUMPER" RESC1005X40X25ML05T05 -56,-51 r90 top
R78 "33" R0603B -92,-51 r90 top value=100k
R79 "0402 JUMPER" RESC1005X40X25ML05T05 -86,-51 r90 top
R80 "33" R0603B -80,-51 r90 top value=100k
R81 "33" R0603B -102,-52 r0 top value=100k
R82 "0402 JUMPER" RESC1005X40X25ML05T05 -98,-51 r90 top
R83 "33" R0603B -121,-51 r90 top value=100k
R84 "0402 JUMPER" RESC1005X40X25ML05T05 -132,-51 r90 top
R85 "0402 JUMPER" RESC1005X40X25ML05T05 -138,-51 r90 top
R86 "33" R0603B -144,-51 r90 top value=100k
R87 "33" R0603B -179,-51 r90 top value=100k
R88 "33" R0603B -197,-51 r90 top value=100k
R89 "1k" R0603B -163,-118 r90 top
R90 "100k" R0603B -169,-118 r90 top
R91 "100k" R0603B -191,-118 r0 top
R92 "1k" R0603B -197,-118 r90 top
R93 "1k" R0603B -203,-118 r90 top
R94 "100k" R0603B -215,-118 r90 top
R95 "100k" R0603B -72,-270 r90 top
R96 "0402 JUMPER" RESC1005X40X25ML05T05 -78,-270 r90 top
R97 "100k" R0603B -97,-270 r90 top
R98 "10" R0603B -131,-270 r90 top
R99 "560" R0603B -137,-270 r90 top
R100 "1k" R0603B -150,-270 r90 top
R101 "100k" R0603B -156,-270 r90 top
R102 "100k" R0603B -163,-270 r90 top
R103 "100k" R0603B -171,-270 r90 top
R104 "100k" R0603B -184,-270 r90 top
R105 "1k" R0603B -209,-270 r90 top
R106 "1k" R0603B -202,-270 r90 top
SD1 "473521001" MOLX-473521001_V -185,-84 r0 top
SW1 "KXT331LHS" FP-KXT331LHS-MFG -175,-130 r0 top
TP1 "TPAD6R" "New footprint 1" -49,-157 r90 top
TP2 "TPAD6R" "New footprint 1" -61,-157 r90 top
TP3 "TPAD6R" "New footprint 1" -66,-157 r90 top
TP4 "TPAD6R" "New footprint 1" -177,-270 r90 top
U1 "MAX96724FGTN/V+" MAX96724FGTN_V+-Footprint-1 186,-282 r0 top
U2 "LD1117S18TR" SOT-223_M 70,-283 r0 top
U3 "LD1117S12TR" SOT-223_M 81,-283 r0 top
U4 "LM2678S-5.0" KTW0007B_N -94,-305 r90 top
U5 "ACS711KLCTR-12AB-T" FP-LC-8-IPC_C -77,-310 r0 top
U6 "MCP2515-I/SO" FP-C04-051-MFG -168,-168 r0 top
U7 "ACS711KLCTR-25AB-T" FP-LC-8-IPC_A -16,-127 r90 top
U8 "TCAN1146DYYRQ1" TCAN1146DYYRQ1-Footprint-1 -119,-129 r0 top
U9 "ADC088S022CIMT/NOPB" MTC16_L -145,-294 r0 top
U10 "ADC088S022CIMT/NOPB" MTC16_L -177,-294 r0 top
U11 "TUSB2036VFR" VF0032A_M -69,-47 r0 top
U12 "ACS711KLCTR-25AB-T" FP-LC-8-IPC_A -155,-114 r90 top
U13 "TS3USB221ARSER" RSE0010A_V -203,-36 r0 top
U14 "MAX-M10M-00B" MAX-M10M-00B-Footprint-1 -86,-265 r0 top
U15 "LT6000IDCB#TRMPBF" FP-DCB-6-05-08-1715-MFG -193,-270 r0 top
Y1 "ABM8G-25.000MHZ-18-D2Y-T" FP-ABM8G-MFG 119,-285 r0 top
Y2 "ASDK-32.768KHZ-LRT" FP-ASDK-MFG -179,-156 r0 top
Y3 "ABM8G-16.000MHZ-4Y-T3" FP-ABM8G-MFG -201,-172 r0 top
Y4 "ABMM-6.000MHZ-B2-T" FP-ABMM-MFG -189,-47 r90 top

## Footprints (in the part's own frame and the unit in brackets; to place one, negate y for a bottom-side part, rotate by r counter-clockwise, add the part's x,y. Pads: shape width x height; smd on the part's side, far side on the other; paste and mask are expansions set on the pad)
0ZCH0075AF2E-Footprint-1 [mil]
  rect 39x110 smd paste+0 mask+0: 1(-59,0) 2(59,0)
  silkscreen extent -27,-60 27,60, body extent -67,-55 67,55, height 47
208658-1052-Footprint-1 [mm]
  rect 0.298x2.6 smd mask+0.064: 1(4.5,10.31) 2(4,10.31) 3(3.5,10.31) 4(3,10.31) 5(2.5,10.31) 6(2,10.31) 7(1.5,10.31) 8(1,10.31) 9(0.5,10.31) 10(0,10.31) 11(-0.5,10.31) 12(-1,10.31) 13(-1.5,10.31) 14(-2,10.31) 15(-2.5,10.31) 16(-3,10.31) 17(-3.5,10.31) 18(-4,10.31) 19(-4.5,10.31)
  oval 1.5x3.3 hole 0.9 slot 2.7 at 90 deg mask+0.064: SH1(7.25,9.55) SH2(-7.25,9.55)
  oval 1.5x2.3 hole 0.9 slot 1.7 at 90 deg mask+0.064: SH3(7.25,3.59) SH4(-7.25,3.59)
  silkscreen extent -7.65,0 7.65,13.08, body extent -7.5,-1.02 7.5,11.13, height 16.1
10164227-1001A1RLF-Footprint-1 [mm]
  rect 0.2x1.14 smd paste-2 mask+0: 1(9.8,-1.32) 2(9.8,1.32) 3(9.4,-1.32) 4(9.4,1.32) 5(9,-1.32) 6(9,1.32) 7(8.6,-1.32) 8(8.6,1.32) 9(8.2,-1.32) 10(8.2,1.32) 11(7.8,-1.32) 12(7.8,1.32) 13(7.4,-1.32) 14(7.4,1.32) 15(7,-1.32) 16(7,1.32) 17(6.6,-1.32) 18(6.6,1.32) 19(6.2,-1.32) 20(6.2,1.32) 21(5.8,-1.32) 22(5.8,1.32) 23(5.4,-1.32) 24(5.4,1.32) 25(5,-1.32) 26(5,1.32) 27(4.6,-1.32) 28(4.6,1.32) 29(4.2,-1.32) 30(4.2,1.32) 31(3.8,-1.32) 32(3.8,1.32) 33(3.4,-1.32) 34(3.4,1.32) 35(3,-1.32) 36(3,1.32) 37(2.6,-1.32) 38(2.6,1.32) 39(2.2,-1.32) 40(2.2,1.32) 41(1.8,-1.32) 42(1.8,1.32) 43(1.4,-1.32) 44(1.4,1.32) 45(1,-1.32) 46(1,1.32) 47(0.6,-1.32) 48(0.6,1.32) 49(0.2,-1.32) 50(0.2,1.32) 51(-0.2,-1.32) 52(-0.2,1.32) 53(-0.6,-1.32) 54(-0.6,1.32) 55(-1,-1.32) 56(-1,1.32) 57(-1.4,-1.32) 58(-1.4,1.32) 59(-1.8,-1.32) 60(-1.8,1.32) 61(-2.2,-1.32) 62(-2.2,1.32) 63(-2.6,-1.32) 64(-2.6,1.32) 65(-3,-1.32) 66(-3,1.32) 67(-3.4,-1.32) 68(-3.4,1.32) 69(-3.8,-1.32) 70(-3.8,1.32) 71(-4.2,-1.32) 72(-4.2,1.32) 73(-4.6,-1.32) 74(-4.6,1.32) 75(-5,-1.32) 76(-5,1.32) 77(-5.4,-1.32) 78(-5.4,1.32) 79(-5.8,-1.32) 80(-5.8,1.32) 81(-6.2,-1.32) 82(-6.2,1.32) 83(-6.6,-1.32) 84(-6.6,1.32) 85(-7,-1.32) 86(-7,1.32) 87(-7.4,-1.32) 88(-7.4,1.32) 89(-7.8,-1.32) 90(-7.8,1.32) 91(-8.2,-1.32) 92(-8.2,1.32) 93(-8.6,-1.32) 94(-8.6,1.32) 95(-9,-1.32) 96(-9,1.32) 97(-9.4,-1.32) 98(-9.4,1.32) 99(-9.8,-1.32) 100(-9.8,1.32)
  silkscreen extent -11.3,-2.6 11.3,1.5, body extent -11.3,-1.69 11.3,1.69, height 1.41
12402012E212A-Footprint-1 [mm]
  rect 0.6x1.14 smd: A1_B12(-3.2,4.75) A4_B9(-2.4,4.75) B1_A12(3.2,4.75) B4_A9(2.4,4.75)
  rect 0.3x1.14 smd: A5(-1.25,4.75) A6(-0.25,4.75) A7(0.25,4.75) A8(1.25,4.75) B5(1.75,4.75) B6(0.75,4.75) B7(-0.75,4.75) B8(-1.75,4.75)
  oval 1.05x2.1 hole 0.6 slot 1.7 at 90 deg: SH1(-4.32,4.18) SH2(4.32,4.18)
  oval 0.9x1.8 hole 0.6 slot 1.4 at 90 deg: SH3(-4.32,0) SH4(4.32,0)
  round 0.65 hole 0.65 unplated: ""(-2.89,3.68) ""(2.89,3.68)
  silkscreen extent -4.47,-2.6 4.47,2.81, body extent -4.46,-2.62 4.47,4.98, height 3.23
9774025243 [mm] "SMT Steel Spacer with internal Thread M2, height 2.5mm"
  round 5.3 / inner round 0 / far side round 0 hole 3 unplated: 1(0,0)
  body extent -2.17,-2.17 2.18,2.17, height 2.5
DIOD-SOT323-3_V [mm] "SOT323, 3-Leads, Body 2.2x1.35mm, Pitch 0.65mm"
  rect 0.9x0.7 smd: 1(-0.95,0.65) 2(-0.95,-0.65) 3(0.95,0)
  silkscreen extent -1.07,-1.1 0.67,1.67, body extent -1.1,-1.1 1.1,1.1, height 1.07
FA1-NDRP-PCB-8-Footprint-1 [mil]
  round 75 hole 46: 1(0,0)
  round 100 hole 67: 2(-100,-100) 2(-100,100) 2(100,-100) 2(100,100)
  silkscreen extent -175,-175 175,250, body extent -157,-183 157,758, height 421
FM4-NZRP-PCB-1-Footprint-1 [mm]
  round 1.2 hole 0.7: 1(-1.91,-2) 2(2.09,-2) 3(2.09,2) 4(-1.91,2)
  round 2.1 hole 1.4: MH1(0,0)
  round 2.55 hole 1.7: MH2(-3.5,-4.575) MH3(4.6,-4.575) MH4(4.6,4.575) MH5(-3.5,4.575)
  silkscreen extent -5.9,-6.5 17.25,6.5, body extent -4.76,-5.99 17.8,5.99, height 15.79
FP-1-2199230-6-MFG [mm]
  rect 0.3x1.55 smd paste+0 mask+0: 1(-9.25,3.9) 2(-9,-3.65) 3(-8.75,3.9) 4(-8.5,-3.65) 5(-8.25,3.9) 6(-8,-3.65) 7(-7.75,3.9) 8(-7.5,-3.65) 9(-7.25,3.9) 10(-7,-3.65) 11(-6.75,3.9) 12(-6.5,-3.65) 13(-6.25,3.9) 14(-6,-3.65) 15(-5.75,3.9) 16(-5.5,-3.65) 17(-5.25,3.9) 18(-5,-3.65) 19(-4.75,3.9) 20(-4.5,-3.65) 21(-4.25,3.9) 22(-4,-3.65) 23(-3.75,3.9) 24(-3.5,-3.65) 25(-3.25,3.9) 26(-3,-3.65) 27(-2.75,3.9) 28(-2.5,-3.65) 29(-2.25,3.9) 30(-2,-3.65) 31(-1.75,3.9) 32(-1.5,-3.65) 33(-1.25,3.9) 34(-1,-3.65) 35(-0.75,3.9) 36(-0.5,-3.65) 37(-0.25,3.9) 38(0,-3.65) 39(0.25,3.9) 40(0.5,-3.65) 41(0.75,3.9) 42(1,-3.65) 43(1.25,3.9) 44(1.5,-3.65) 45(1.75,3.9) 46(2,-3.65) 47(2.25,3.9) 48(2.5,-3.65) 49(2.75,3.9) 50(3,-3.65) 51(3.25,3.9) 52(3.5,-3.65) 53(3.75,3.9) 54(4,-3.65) 55(4.25,3.9) 56(4.5,-3.65) 57(4.75,3.9) 58(5,-3.65) 67(7.25,3.9) 68(7.5,-3.65) 69(7.75,3.9) 70(8,-3.65) 71(8.25,3.9) 72(8.5,-3.65) 73(8.75,3.9) 74(9,-3.65) 75(9.25,3.9)
  rect 1.2x2.75 smd paste+0 mask+0: 76(-10.35,3.125) 77(10.35,3.125)
  round 1.1 hole 1.1 unplated paste-2539.97 mask+0: ""(-10,-1.375)
  round 1.6 hole 1.6 unplated paste-2539.97 mask+0: ""(10,-1.375)
  silkscreen extent -11,-3.98 11,5.35, body extent -11.1,-4.52 11.1,4.77, height 0.25
FP-318-08-IPC_B [mm]
  rect 1.524x0.578 smd paste+0 mask+0: 1(-0.91,0.95)
  rrect100% 1.524x0.578 smd paste+0 mask+0: 2(-0.91,-0.95) 3(0.91,0)
  silkscreen extent -0.65,-1.45 0.65,1.45, body extent -1.92,-1.7 1.92,1.7, height 0.25
FP-0402-L_1_0_0_05-W_0_5-IPC_A [mm]
  rect 0.715x0.672 smd paste+0 mask+0: 1(-0.479,0) 2(0.479,0)
  silkscreen extent -0.84,-0.74 0.84,0.74, body extent -1.04,-0.54 1.04,0.54, height 0.25
FP-0685T-MFG [mm]
  rect 1.14x1.78 smd paste+0 mask+0: 1(-1.33,0) 2(1.33,0)
  silkscreen extent -0.39,-0.89 0.39,0.89, body extent -2,-0.99 2,0.99, height 0.25
FP-1210POC-MFG [mm]
  rect 0.65x2.65 smd paste+0 mask+0: 1(-1.27,0) 2(1.27,0)
  silkscreen extent -0.57,-1.34 0.57,1.34, body extent -1.75,-1.44 1.75,1.44, height 0.25
FP-776163-1-MFG [mm]
  rect 2.65x2.65 hole 1.75 paste-2539.97 mask+0: 1(-22,16.95)
  round 2.65 hole 1.75 paste-2539.97 mask+0: 2(-18,16.95) 3(-14,16.95) 4(-10,16.95) 5(-6,16.95) 6(-2,16.95) 7(2,16.95) 8(6,16.95) 9(10,16.95) 10(14,16.95) 11(18,16.95) 12(22,16.95) 13(-20,12.95) 14(-16,12.95) 15(-12,12.95) 16(-8,12.95) 17(-4,12.95) 18(0,12.95) 19(4,12.95) 20(8,12.95) 21(12,12.95) 22(16,12.95) 23(20,12.95) 24(-22,8.95) 25(-18,8.95) 26(-14,8.95) 27(-10,8.95) 28(-6,8.95) 29(-2,8.95) 30(2,8.95) 31(6,8.95) 32(10,8.95) 33(14,8.95) 34(18,8.95) 35(22,8.95)
  round 2.85 hole 2.85 unplated paste-2539.97 mask+0: ""(-28.5,12.45) ""(28.5,12.45)
  silkscreen extent -39.18,4.1 38.55,19.15, body extent -38.65,-19.25 38.65,19.25, height 0.25
FP-470531000-MFG [mm]
  rect 1.57x1.57 hole 1.02 paste-2539.97 mask+0: 1(3.81,-0.38)
  round 1.57 hole 1.02 paste-2539.97 mask+0: 2(1.27,-0.38) 3(-1.27,-0.38) 4(-3.81,-0.38)
  round 1.25 hole 1.25 unplated paste-2539.97 mask+0: ""(-1.27,-2.54)
  silkscreen extent -5.2,-3.02 5.92,3.02, body extent -5.3,-3.26 5.3,3.12, height 0.25
FP-ABM8G-MFG [mm]
  rect 1.4x1.2 smd paste+0 mask+0: 1(-1.1,-0.85) 2(1.1,-0.85) 3(1.1,0.85) 4(-1.1,0.85)
  silkscreen extent -2.47,-1.83 1.6,1.83, body extent -1.9,-1.55 1.9,1.55, height 0.25
FP-ABMM-MFG [mm]
  rect 2.2x1.4 smd paste+0 mask+0: 1(-3.15,-1.27) 2(-3.15,1.27) 3(3.15,1.27)
  rect 2.4x1.4 smd paste+0 mask+0: 4(3.05,-1.27)
  silkscreen extent -4.95,-2.6 3.6,2.6, body extent -4.35,-2.7 4.35,2.7, height 0.25
FP-ASDK-MFG [mm]
  rect 1x0.9 smd paste+0 mask+0: 1(-0.813,-0.613) 2(0.813,-0.613) 3(0.813,0.613) 4(-0.813,0.613)
  silkscreen extent -1.7,-1.76 1.7,1.05, body extent -1.41,-1.16 1.41,1.16, height 0.25
FP-BM04B-SRSS-TBT_LF_SN-MFG [mm]
  rect 0.6x1.55 smd paste+0 mask+0: 1(-1.5,-1.775) 2(-0.5,-1.775) 3(0.5,-1.775) 4(1.5,-1.775)
  rect 1.2x1.8 smd paste+0 mask+0: 5(-2.8,0.75) 6(2.8,0.75)
  silkscreen extent -3,-3.32 3,1.45, body extent -3.5,-2.65 3.5,1.75, height 0.25
FP-C04-051-MFG [mm]
  rrect100% 1.9x0.6 smd paste+0 mask+0: 1(-4.7,5.08) 2(-4.7,3.81) 3(-4.7,2.54) 4(-4.7,1.27) 5(-4.7,0) 6(-4.7,-1.27) 7(-4.7,-2.54) 8(-4.7,-3.81) 9(-4.7,-5.08) 10(4.7,-5.08) 11(4.7,-3.81) 12(4.7,-2.54) 13(4.7,-1.27) 14(4.7,0) 15(4.7,1.27) 16(4.7,2.54) 17(4.7,3.81) 18(4.7,5.08)
  silkscreen extent -6.42,-5.87 3.8,5.87, body extent -5.75,-6.12 5.75,6.12, height 0.25
FP-DCB-6-05-08-1715-MFG [mm]
  rect 0.7x0.25 smd paste+0 mask+0: 1(-1.425,0.5) 2(-1.425,0) 3(-1.425,-0.5) 4(1.425,-0.5) 5(1.425,0) 6(1.425,0.5)
  rect 1.65x1.35 smd paste+0 mask+0: 7(0,0)
  silkscreen extent -2.57,-1.05 1.55,1.05, body extent -1.88,-1.15 1.88,1.15, height 0.25
FP-DQA0010A-MFG [mm]
  rrect50% 0.565x0.2 smd paste+0 mask+0: 1(-0.417,1) 2(-0.417,0.5) 4(-0.417,-0.5) 5(-0.417,-1) 6(0.417,-1) 7(0.417,-0.5) 9(0.417,0.5) 10(0.417,1)
  rrect25% 0.565x0.4 smd paste-1000 mask+0: 3(-0.417,0) 8(0.417,0)
  silkscreen extent -1.37,-1.48 0.55,1.48, body extent -0.8,-1.4 0.8,1.4, height 0.25
FP-GRM21B-0_2-e0_2_0_7-IPC_B [mm]
  rect 1.255x1.456 smd paste+0 mask+0: 1(-0.826,0) 2(0.826,0)
  silkscreen extent -1.45,-1.13 1.45,1.13, body extent -1.7,-0.98 1.7,0.98, height 0.25
FP-GRM188-0_1-e0_2_0_55-IPC_A [mm]
  rect 1.208x1.012 smd paste+0 mask+0: 1(-0.802,0) 2(0.802,0)
  silkscreen extent -1.41,-0.91 1.41,0.91, body extent -1.91,-1.01 1.91,1.01, height 0.25
FP-KXT331LHS-MFG [mm]
  rect 0.55x1.5 smd paste+0 mask+0: 1(-1.625,0) 2(1.625,0)
  silkscreen extent -1.65,-1.15 1.65,1.15, body extent -2,-1.25 2,1.25, height 0.25
FP-LC-8-IPC_A [mm]
  rect 2.474x0.622 smd paste+0 mask+0: 1(-2.416,1.905)
  rrect100% 2.474x0.622 smd paste+0 mask+0: 2(-2.416,0.635) 3(-2.416,-0.635) 4(-2.416,-1.905) 5(2.416,-1.905) 6(2.416,-0.635) 7(2.416,0.635) 8(2.416,1.905)
  silkscreen extent -4.37,-2.45 0.68,2.45, body extent -4.15,-2.95 4.15,2.95, height 0.25
FP-LC-8-IPC_C [mm]
  rect 1.874x0.542 smd paste+0 mask+0: 1(-2.316,1.905)
  rrect100% 1.874x0.542 smd paste+0 mask+0: 2(-2.316,0.635) 3(-2.316,-0.635) 4(-2.316,-1.905) 5(2.316,-1.905) 6(2.316,-0.635) 7(2.316,0.635) 8(2.316,1.905)
  silkscreen extent -3.97,-2.45 0.88,2.45, body extent -3.35,-2.55 3.35,2.55, height 0.25
FP-LQW18AN_00-MFG [mm]
  rect 0.625x0.85 smd paste+0 mask+0: 1(-0.663,0) 2(0.663,0)
  silkscreen extent -0.9,-0.82 0.9,0.82, body extent -1.07,-0.6 1.07,0.6, height 0.25
FP-MTLW-102-07-G-S-230-MFG [mm]
  rect 1.52x1.52 hole 1.02 paste-2539.97 mask+0: 1(-1.27,0)
  round 1.52 hole 1.02 paste-2539.97 mask+0: 2(1.27,0)
  silkscreen extent -3.27,-1.31 2.67,1.31, body extent -2.77,-1.41 2.77,1.41, height 0.25
FP-OS-CON-SMT-E7-MFG [mm]
  rect 4.15x1.9 smd paste+0 mask+0: 1(-3.475,0) 2(3.475,0)
  silkscreen extent -6.3,-4.25 4.25,4.25, body extent -5.8,-4.5 5.8,4.5, height 0.25
FP-PFL1609-MFG [mm]
  rect 0.64x1.02 smd paste+0 mask+0: 1(-0.635,0) 2(0.635,0)
  silkscreen extent -0.9,-0.89 0.9,0.89, body extent -1.05,-0.64 1.05,0.64, height 0.25
FP-S4B-XH-SM4-TB_LF_SN-MFG [mm]
  rect 1.3x4.5 smd paste+0 mask+0: 1(-3.75,5.05) 2(-1.25,5.05) 3(1.25,5.05) 4(3.75,5.05)
  rect 1.8x3.9 smd paste+0 mask+0: 5(-6.95,-1.75) 6(6.95,-1.75)
  silkscreen extent -7.5,-3.5 7.5,7.97, body extent -7.95,-3.8 7.95,7.4, height 0.25
FP-SC-MFG [mm]
  rect 2.8x1.6 smd paste+0 mask+0: 1(-2.15,0) 2(2.15,0)
  silkscreen extent -4.22,-2.75 2.75,2.75, body extent -3.8,-3 3.8,3, height 0.25
FP-SMC-MFG [mm]
  rect 2.5x3.3 smd paste+0 mask+0: 1(-3.45,0) 2(3.45,0)
  silkscreen extent -4.25,-3.11 3.55,3.11, body extent -4.8,-3.21 4.8,3.21, height 0.25
FP-SOD-123-IPC_A [mm]
  rect 1.308x0.762 smd paste+0 mask+0: 1(-1.825,0)
  rrect100% 1.308x0.762 smd paste+0 mask+0: 2(1.825,0)
  silkscreen extent -2.39,-0.8 1.35,1.01, body extent -2.98,-1.3 2.98,1.3, height 0.25
FP-SOT323-3L-MFG [mm]
  rect 0.7x0.42 smd paste+0 mask+0: 1(-1,0.65) 2(-1,-0.65) 3(1,0)
  silkscreen extent -0.67,-1.1 0.67,1.1, body extent -1.45,-1.2 1.45,1.2, height 0.25
FP-SRF4532-MFG [mm]
  round 0.99 smd paste+0 mask+0: 1(-2.05,-1.25) 2(2.05,-1.25)
  round 0.97 smd paste+0 mask+0: 3(2.05,1.125) 4(-2.05,1.125)
  Top Layer region: -2.6,0.45 -2.6,1.8 -1.5,1.8 -1.5,0.95 -1.9,0.45
  Top Layer region: 1.5,1.8 2.6,1.8 2.6,0.45 1.9,0.45 1.5,0.95
  Top Layer region: 1.5,-1.8 1.5,-0.95 1.9,-0.45 2.6,-0.45 2.6,-1.8
  Top Layer region: -2.6,-1.8 -2.6,-0.45 -1.9,-0.45 -1.5,-0.95 -1.5,-1.8
  silkscreen extent -2.17,-2.47 1.12,1.7, body extent -2.7,-1.9 2.7,1.9, height 0.25
FP-U_FL-R-SMT_10-MFG [mm]
  rect 1x1.05 smd paste-1000 mask+0: 1(0,1.525)
  rect 1.05x2.2 smd paste-1000 mask+0: 2(-1.475,0) 3(1.475,0)
  silkscreen extent -0.58,-1.38 0.58,-1.38, body extent -2.1,-1.48 2.1,2.15, height 0.25
KSTN-3001_V [mm] "THD, 2-Leads, Body 13.21x12.07mm"
  rect 2.35x2.35 hole 1.85: 1(-6.605,0)
  round 2.35 hole 1.85: 2(6.605,0)
  rect 3.96x3.96 smd: 3(0,0)
  silkscreen extent -8.45,-6.73 6.61,5.34, body extent -6.61,-6.73 6.61,5.34, height 3
KTW0007B_N [mm] "DPAK, 7-Leads, Body 9.4x10.4mm, Pitch 1.27mm, IPC Medium Density"
  rrect11% 3.5x0.95 smd: 1(-6.3,3.81) 2(-6.3,2.54) 3(-6.3,1.27) 4(-6.3,0) 5(-6.3,-1.27) 6(-6.3,-2.54) 7(-6.3,-3.81)
  rrect1% 8.8x10.5 smd: 8(3.65,0)
  silkscreen extent -6.42,-5.2 -1.15,5.2, body extent -3.25,-5.2 6.15,5.2, height 4.65
MAX96724FGTN_V+-Footprint-1 [mm]
  oval 0.95x0.25 smd: 1(-3.875,3.25) 2(-3.875,2.75) 3(-3.875,2.25) 4(-3.875,1.75) 5(-3.875,1.25) 6(-3.875,0.75) 7(-3.875,0.25) 8(-3.875,-0.25) 9(-3.875,-0.75) 10(-3.875,-1.25) 11(-3.875,-1.75) 12(-3.875,-2.25) 13(-3.875,-2.75) 14(-3.875,-3.25) 29(3.875,-3.25) 30(3.875,-2.75) 31(3.875,-2.25) 32(3.875,-1.75) 33(3.875,-1.25) 34(3.875,-0.75) 35(3.875,-0.25) 36(3.875,0.25) 37(3.875,0.75) 38(3.875,1.25) 39(3.875,1.75) 40(3.875,2.25) 41(3.875,2.75) 42(3.875,3.25)
  oval 0.25x0.95 smd: 15(-3.25,-3.875) 16(-2.75,-3.875) 17(-2.25,-3.875) 18(-1.75,-3.875) 19(-1.25,-3.875) 20(-0.75,-3.875) 21(-0.25,-3.875) 22(0.25,-3.875) 23(0.75,-3.875) 24(1.25,-3.875) 25(1.75,-3.875) 26(2.25,-3.875) 27(2.75,-3.875) 28(3.25,-3.875) 43(3.25,3.875) 44(2.75,3.875) 45(2.25,3.875) 46(1.75,3.875) 47(1.25,3.875) 48(0.75,3.875) 49(0.25,3.875) 50(-0.25,3.875) 51(-0.75,3.875) 52(-1.25,3.875) 53(-1.75,3.875) 54(-2.25,3.875) 55(-2.75,3.875) 56(-3.25,3.875)
  rect 4.7x4.7 smd: 57(0,0)
  silkscreen extent -4.97,-4.2 4.2,4.2, body extent -4.05,-4.05 4.05,4.05, height 0.8
MAX-M10M-00B-Footprint-1 [mm]
  rect 1.55x0.8 smd: 1(-4.6,4.4) 2(-4.6,3.3) 3(-4.6,2.2) 4(-4.6,1.1) 5(-4.6,0) 6(-4.6,-1.1) 7(-4.6,-2.2) 8(-4.6,-3.3) 9(-4.6,-4.4) 10(4.6,-4.4) 11(4.6,-3.3) 12(4.6,-2.2) 13(4.6,-1.1) 14(4.6,0) 15(4.6,1.1) 16(4.6,2.2) 17(4.6,3.3) 18(4.6,4.4)
  silkscreen extent -5.26,4.91 -5.16,5.01, body extent -4.85,-5.35 4.85,5.05, height 2.7
MOLX-48408-0003_V [mm] "USB 3.0 I/O Receptacle, 9-Leads, Vertical, Height 15.25 mm, Through Hole"
  rect 1.2x1.2 hole 0.7: 1(-3.5,-0.75)
  round 1.2 hole 0.7: 2(-1,-0.75) 3(1,-0.75) 4(3.5,-0.75) 5(4,0.75) 6(2,0.75) 7(0,0.75) 8(-2,0.75) 9(-4,0.75)
  round 2.8 hole 2.3 unplated: 10(-6.57,-0.65) 11(6.57,-0.65)
  silkscreen extent -7.3,-5.03 7.3,2.95, body extent -7.8,-4.11 7.8,2.81, height 15
MOLX-473521001_V [mm] "SMD, 8-Leads, Body 15.2x14mm, Pitch 1.1mm"
  rect 0.8x1.5 smd: 1(1.94,-3.66) 2(0.84,-3.26) 3(-0.26,-3.66) 4(-1.36,-3.86) 5(-2.46,-3.66) 6(-3.56,-3.86) 7(-4.66,-3.66) 8(-5.76,-3.66)
  rect 1x0.95 smd: 9(-3.56,7.425)
  rect 1.3x1.4 smd: 10(-4.95,7.2) 11(0.75,7.2)
  rect 1.4x1.9 smd: 12(6.6,-6.95) 13(-6.55,-5.95)
  silkscreen extent -7,-7.6 7.78,7.6, body extent -7.05,-7.6 7.05,7.6, height 1.85
MTC16_L [mm] "TSOP, 16-Leads, Body 5x4.4mm, Pitch 0.65mm, IPC High Density"
  oval 1.4x0.35 smd: 1(-2.8,2.275) 2(-2.8,1.625) 3(-2.8,0.975) 4(-2.8,0.325) 5(-2.8,-0.325) 6(-2.8,-0.975) 7(-2.8,-1.625) 8(-2.8,-2.275) 9(2.8,-2.275) 10(2.8,-1.625) 11(2.8,-0.975) 12(2.8,-0.325) 13(2.8,0.325) 14(2.8,0.975) 15(2.8,1.625) 16(2.8,2.275)
  silkscreen extent -2.92,-2.55 1.7,3.12, body extent -2.25,-2.55 2.25,2.55, height 1.1
"New footprint 1" [mm]
  round 0.6 smd paste-1: 1(0,0)
ONSC-SOD-123-2-425-04_V [mm] "SOD, 2-Leads, Body 2.69x1.6mm"
  rect 0.91x1.22 smd: 1(-1.635,0) 2(1.635,0)
  silkscreen extent -1.76,-0.8 0.78,1.28, body extent -1.35,-0.8 1.35,0.8, height 1.35
ONSC-SOD-523-2-502-01_V [mm] "SOD, 2-Leads, Body 1.2x0.8mm"
  rect 0.48x0.4 smd: 1(-0.66,0) 2(0.66,0)
  silkscreen extent -0.75,-0.4 0.07,0.65, body extent -0.6,-0.4 0.6,0.4, height 0.7
R0603B [mm] "Chip Resistor, 0603, 2-Leads, Body 1.58x0.85mm, IPC Medium Density"
  rrect25% 0.8x0.95 smd: 1(-0.65,0) 2(0.65,0)
  silkscreen extent -0.2,-0.7 0.2,0.7, body extent -0.82,-0.48 0.82,0.48, height 0.5
RESC1005X40X25ML05T05 [mm] "Chip Resistor, 2-Leads, Body 1.00x0.50mm, IPC Low Density"
  rect 0.65x0.65 smd: 1(-0.5,0) 2(0.5,0)
  body extent -0.53,-0.27 0.53,0.28, height 0.4
RESC1608X90X30ML15T20 [mm] "Chip Resistor, 2-Leads, Body 1.60x0.80mm, IPC Low Density"
  rect 0.95x1.05 smd: 1(-0.7,0) 2(0.7,0)
  body extent -0.88,-0.48 0.87,0.48, height 0.9
RESC1609X55X30LL15T15 [mm] "Chip Resistor, 2-Leads, Body 1.75x0.95mm, IPC High Density"
  rect 0.75x0.85 smd: 1(-0.65,0) 2(0.65,0)
  body extent -0.87,-0.48 0.87,0.48, height 0.55
RJMG201K21120FR-Footprint-1 [mm]
  round 1.53 hole 1.02: L1(-6.785,-4.57) L2(-6.785,-2.54) L3(6.785,-4.57) L4(6.785,-2.54)
  rect 1.398x1.398 / inner round 1.398 / far side rect 1.398x1.398 hole 0.89: P1(5.715,6.35)
  round 1.398 hole 0.89: P2(4.445,8.89) P3(3.175,6.35) P4(1.905,8.89) P5(0.635,6.35) P6(-0.635,8.89) P7(-1.905,6.35) P8(-3.175,8.89) P9(-4.445,6.35) P10(-5.715,8.89)
  round 2.4 hole 1.6: S1(-7.745,3.05) S2(7.745,3.05)
  round 3.25 hole 3.25 unplated: ""(-5.715,0) ""(5.715,0)
  silkscreen extent -7.88,-10.84 8.63,10.81, body extent -8.87,-10.84 8.87,10.81, height 14.8
"RPI CM5 W_ COOLER-Footprint-1" [mm]
  body extent -3.5,-3.5 51.5,36.5, height 5.01
RSE0010A_V [mm] "QFN, 10-Leads, Body 1.5x2mm, Pitch 0.5mm, TI Recommended"
  rrect50% 0.55x0.2 smd: 1(-0.675,0.75) 2(-0.675,0.25) 3(-0.675,-0.25) 4(-0.675,-0.75) 6(0.675,-0.75) 7(0.675,-0.25) 8(0.675,0.25) 9(0.675,0.75)
  rrect33% 0.3x0.6 smd: 5(0,-0.9) 10(0,0.9)
  silkscreen extent -1.07,-1.17 0.77,1.18, body extent -0.77,-1.02 0.78,1.03, height 0.61
SISH615ADN-T1-GE3-Footprint-1 [mm]
  rect 0.35x0.5 smd paste+0 mask+0: 1(-0.937,-1.4) 2(-0.288,-1.4) 3(0.363,-1.4) 4(1.012,-1.4)
  round 0.025 smd mask+0: 5-6-7-8(0.038,0.51)
  Top Layer region: -1.187,-0.63 -1.187,-0.215 -1.568,-0.215 -1.568,0.215 -1.187,0.215 -1.187,1.35 -1.137,1.35 -1.137,1.65 -0.737,1.65 -0.737,1.35 -0.487,1.35 -0.487,1.65 -0.088,1.65 -0.088,1.35 0.163,1.35 0.163,1.65 0.563,1.65 0.563,1.35 0.813,1.35 0.813,1.65 1.212,1.65 1.212,1.35 1.262,1.35 1.262,0.215 1.643,0.215 1.643,-0.215 1.262,-0.215 1.262,-0.63
  silkscreen extent -1.51,-2.37 1.59,-1.01, body extent -1.67,-1.75 1.74,1.75, height 0.25
SMTC-MTSW-107-07-X-D-170 [mm] "Assembly .025\" [.64] SQ Post Terminal Strip, 2x7 Pins, Vertical, 2.54mm Pitch, Male"
  rect 1.55x1.55 hole 1.02: 1(0,0)
  round 1.55 hole 1.02: 2(0,2.54) 3(2.54,0) 4(2.54,2.54) 5(5.08,0) 6(5.08,2.54) 7(7.62,0) 8(7.62,2.54) 9(10.16,0) 10(10.16,2.54) 11(12.7,0) 12(12.7,2.54) 13(15.24,0) 14(15.24,2.54)
  silkscreen extent -1.46,-1.27 16.7,3.81, body extent -1.27,-1.27 16.51,3.81, height 6.86
SOT95P284X110-6N [mm] "SOT23, 6-Leads, Body 2.98x2.84mm, Pitch 0.95mm, IPC Medium Density"
  rect 1x0.55 smd: 1(-1.35,0.95) 2(-1.35,0) 3(-1.35,-0.95) 4(1.35,-0.95) 5(1.35,0) 6(1.35,0.95)
  silkscreen extent -1.47,-1.55 0.45,1.9, body extent -0.85,-1.55 0.85,1.55, height 1.1
SOT-223_M [mm] "SOT223, 4-Leads, Body 6.5x3.5mm, Pitch 2.3mm, Lead Span 7mm, IPC Low Density"
  rect 2.7x1 smd: 1(-2.95,2.3) 2(-2.95,0) 3(-2.95,-2.3)
  rect 2.7x3.3 smd: 4(2.95,0)
  silkscreen extent -3.07,-3.35 1.3,3.47, body extent -1.85,-3.35 1.85,3.35, height 1.8
TCAN1146DYYRQ1-Footprint-1 [mil]
  rect 38.5x12 smd paste+0 mask+0: 1(-60.75,59.07) 2(-60.75,39.38) 3(-60.75,19.69) 4(-60.75,0) 5(-60.75,-19.69) 6(-60.75,-39.38) 7(-60.75,-59.07) 8(60.75,-59.07) 9(60.75,-39.38) 10(60.75,-19.69) 11(60.75,0) 12(60.75,19.69) 13(60.75,39.38) 14(60.75,59.07)
  silkscreen extent -46,-90 100,90, body extent -66,-84 66,84, height 43
VF0032A_M [mm] "QFP, 32-Leads, Body 7x7mm, Pitch 0.8mm, IPC Low Density"
  rrect17% 1.65x0.6 smd: 1(-4.325,2.8) 2(-4.325,2) 3(-4.325,1.2) 4(-4.325,0.4) 5(-4.325,-0.4) 6(-4.325,-1.2) 7(-4.325,-2) 8(-4.325,-2.8) 17(4.325,-2.8) 18(4.325,-2) 19(4.325,-1.2) 20(4.325,-0.4) 21(4.325,0.4) 22(4.325,1.2) 23(4.325,2) 24(4.325,2.8)
  rrect17% 0.6x1.65 smd: 9(-2.8,-4.325) 10(-2,-4.325) 11(-1.2,-4.325) 12(-0.4,-4.325) 13(0.4,-4.325) 14(1.2,-4.325) 15(2,-4.325) 16(2.8,-4.325) 25(2.8,4.325) 26(2,4.325) 27(1.2,4.325) 28(0.4,4.325) 29(-0.4,4.325) 30(-1.2,4.325) 31(-2,4.325) 32(-2.8,4.325)
  silkscreen extent -4.45,-3.1 3.1,3.77, body extent -4.51,-4.51 4.51,4.51, height 1.6
WE-PD-L [mm] "SMD Inductor, 2-Leads, Body 12.0 x 12.0 mm"
  rect 2.9x5.4 smd: 1(-4.95,0) 2(4.95,0)
  silkscreen extent -6.25,-6.25 6.25,6.25, body extent -6,-6 6,6, height 5.98
WE-TPC_1038 [mm] "Power Inductor, SMD, 2-Leads, body 10x10mm"
  rect 4.6x1.8 smd: 1(0,4.5) 2(0,-4.5)
  silkscreen extent -5,-4.5 5,6.02, body extent -5,-5 5,5, height 3.8
WL-SBCD_0606 [mm] "SMT Bi-color Chip LED Diffuesed, body 1.5x1.6mm"
  rect 0.5x0.8 smd: 1(-0.45,0.8) 2(-0.45,-0.8) 3(0.45,-0.8) 4(0.45,0.8)
  silkscreen extent -0.07,1.48 0.08,1.62, body extent -0.75,-0.8 0.75,0.8, height 0.55